# Altium PCB Ticket_Dispancer.PcbDoc (part 2 of 5)
Units mm, origin at the board's own origin, x right, y up, seen from the top; angles counter-clockwise.
Board outline 150.11 x 200.66 mm, 2 copper layers (Top Layer, Bottom Layer); 297 components, 258 nets, 997 pads, 217 vias.
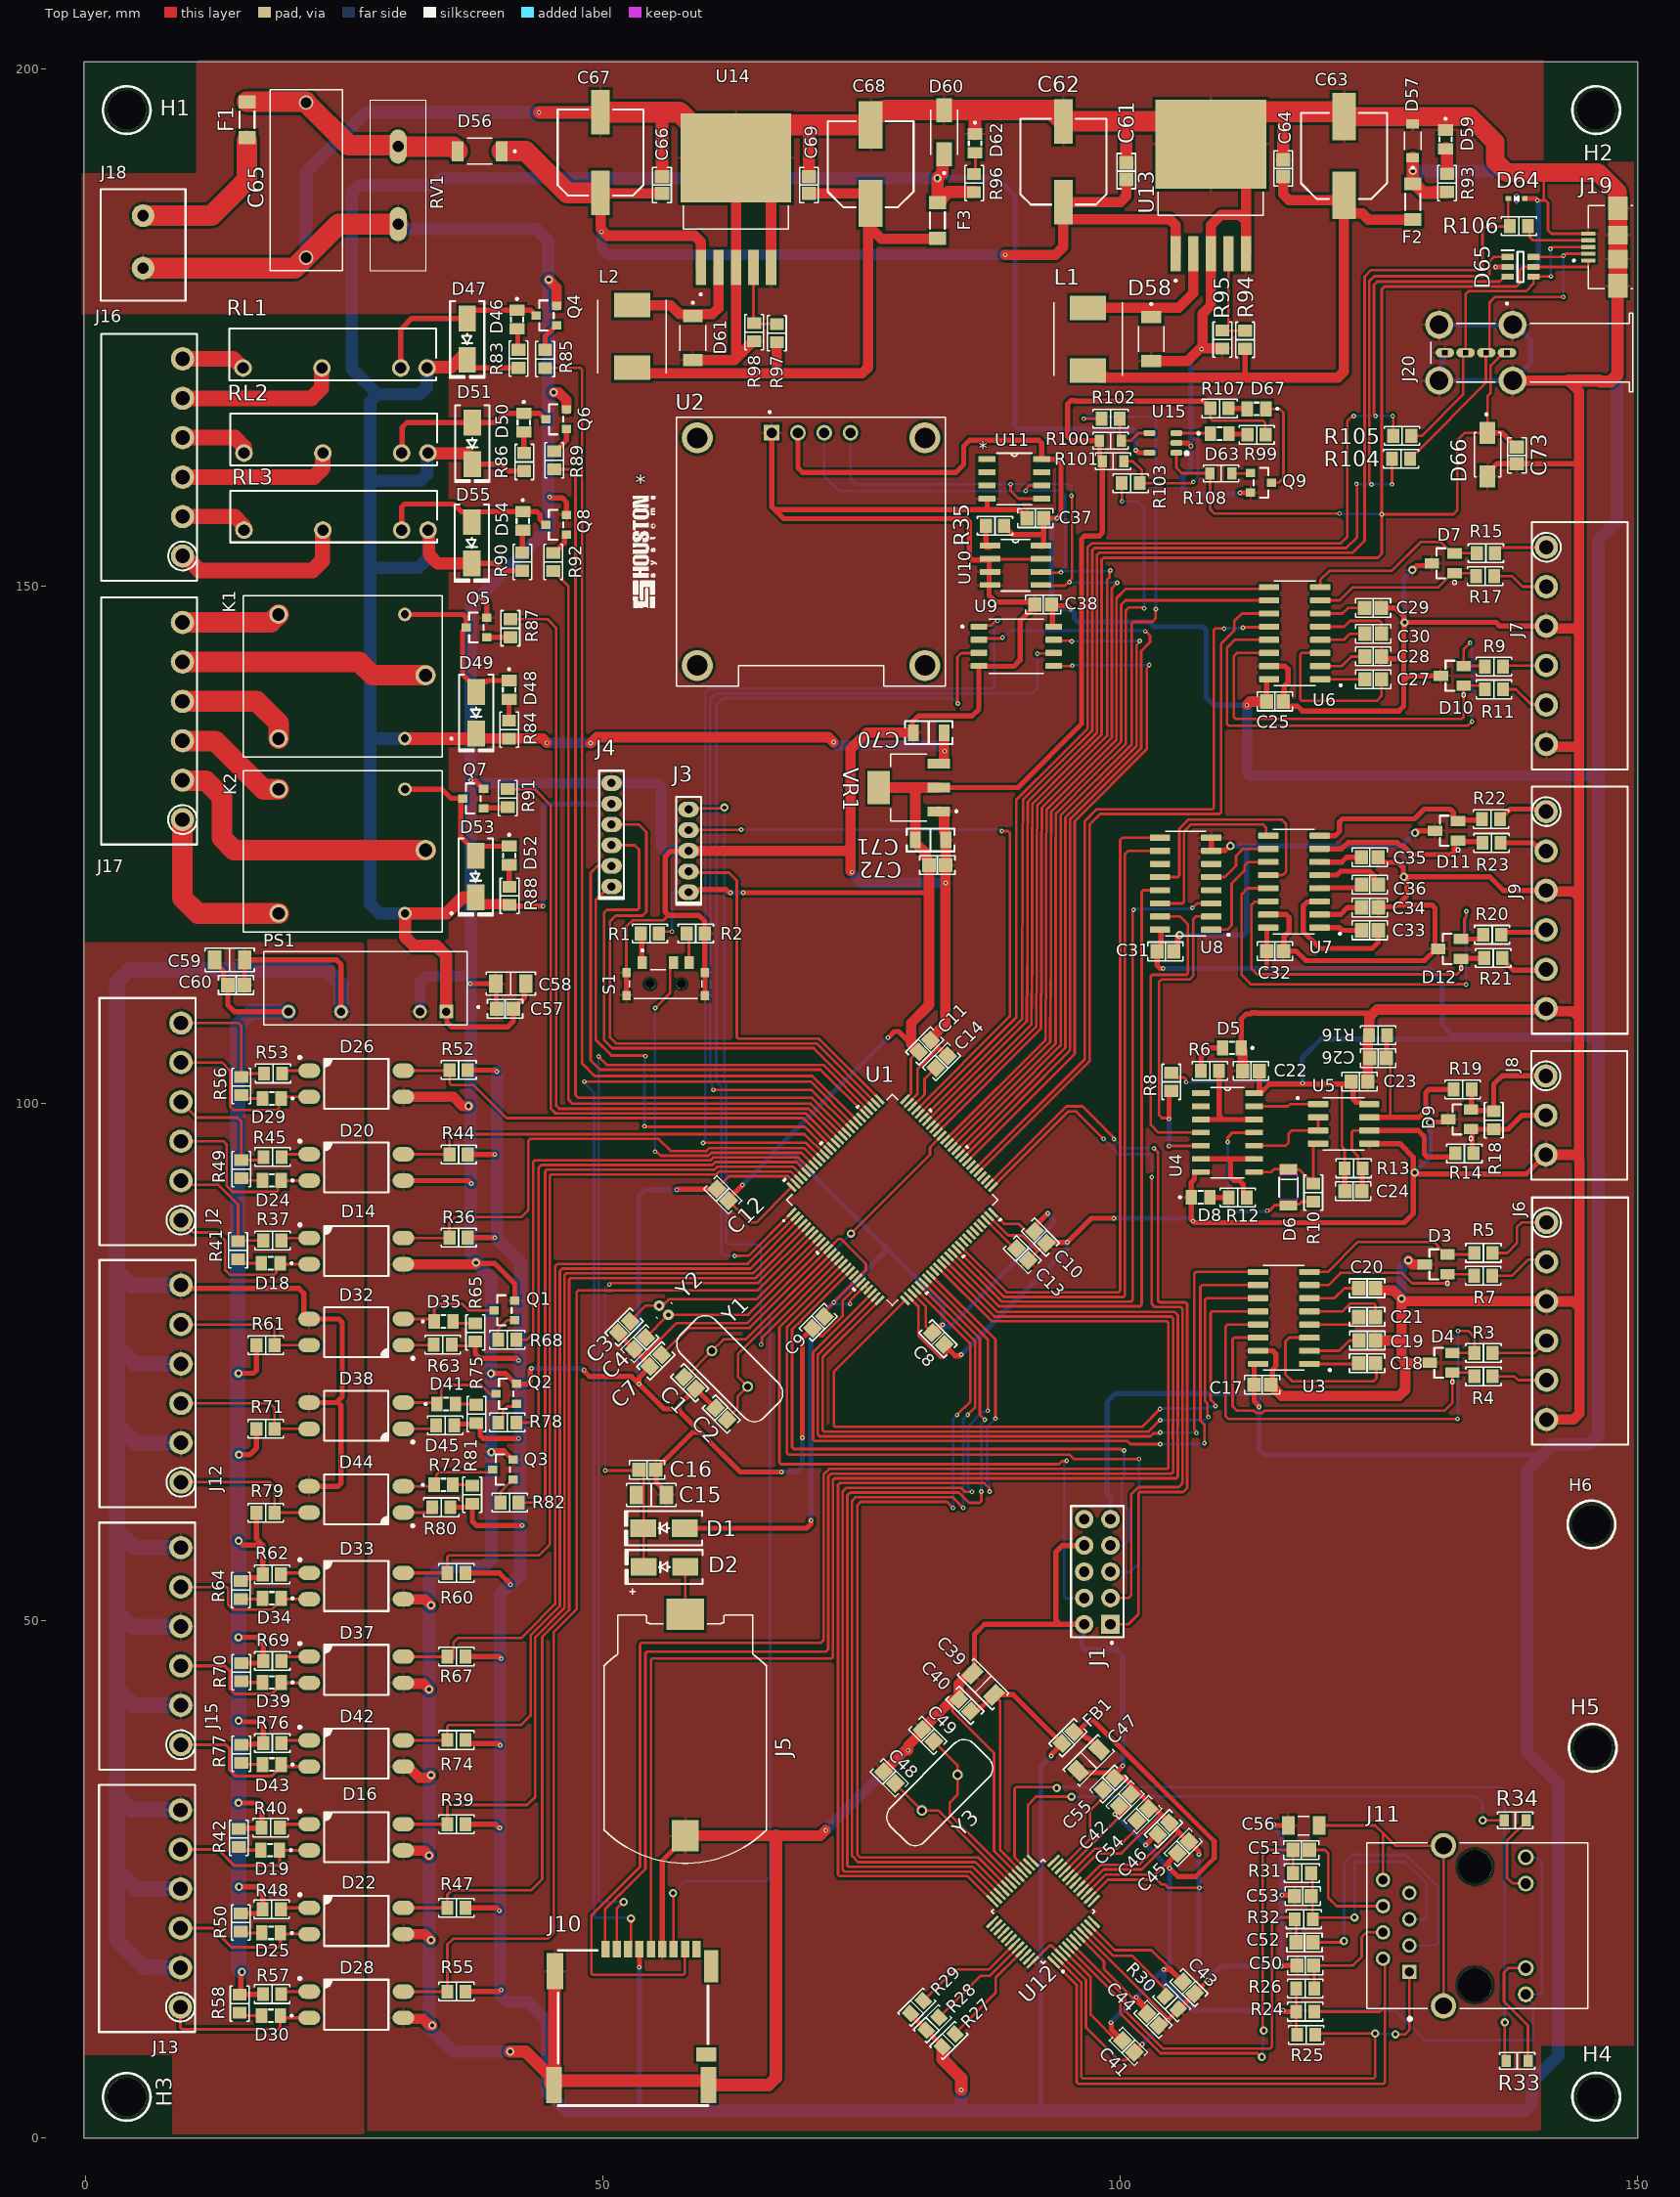
[diagram p0: Top Layer view]

## Part data (continued)
D1 D2 D47 D49 D51 D53 D55: "DIODE GEN PURP 1KV 1A DO214AC", Current - Average Rectified (Io)=1A, Current - Reverse Leakage @ Vr="5 µA @ 1000 V", manufacturer="Comchip Technology", Operating Temperature - Junction="-55°C ~ 150°C", Package / Case="DO-214AC, SMA", Supplier Device Package="DO-214AC (SMA)", Supplier Part Number 1=641-1018-1-ND, Voltage - DC Reverse (Vr) (Max)="1000 V", Voltage - Forward (Vf) (Max) @ If="1.1 V @ 1 A", componentlink1description=Datasheet, componentlink1url="http://www.comchiptech.com/admin/files/product/CGRA4001-G Thru647907. CGRA4007-G RevE.pdf", componentlink2description="DigiKey Link", componentlink2url=https://www.digikey.com/en/products/detail/comchip-technology/CGRA4007-G/1121050, Diode Type=Standard, lastupdated="03-06-2024 7.54.36 PM", Lifecycle Status=Active, Minimum Order=1, Mounting Type="Surface Mount", packaging=TapeAndReel, Part Number=CGRA4007-G, Part Status=Active, partid=670, price=0.04, series=-, Speed="Standard Recovery >500ns, > 200mA (Io)", Supplier 1=DigiKey
D3 D4 D7 D9 D10 D11 D12: "SM Series 12 V 400 W Asymmetrical TVS Diode for Extended Common-Mode - SOT-23", Package="SOT-23 Semtech", Check_prices=https://www.snapeda.com/parts/SM712.TCT/Semtech/view-part/?ref=eda, MF="Semtech Corporation", MP=SM712.TCT, SnapEDA_Link=https://www.snapeda.com/parts/SM712.TCT/Semtech/view-part/?ref=snap
D5 D8 D18 D19 D24 D25 D29 D30 D34 D35 D39 D41 D43 D45 D46 D48 D50 D52 D54 D59 D62 D63 D67: "LED Uni-Color Green 4-Pin Chip 0805 T/R", Package=None, Availability=Unavailable, MP=597-3305-607F, price=None
D6: "Diode Standard 75 V 300mA (DC) Surface Mount SOD-80 MiniMELF", Package="SOD-80 Vishay Semiconductor Diodes Division", Check_prices=https://www.snapeda.com/parts/LL4148-GS08/Vishay+General+Semiconductor+-+Diodes+Division/view-part/?ref=eda, MF="Vishay General Semiconductor - Diodes Division", MP=LL4148-GS08, SnapEDA_Link=https://www.snapeda.com/parts/LL4148-GS08/Vishay+General+Semiconductor+-+Diodes+Division/view-part/?ref=snap
D14 D16 D20 D22 D26 D28 D32 D33 D37 D38 D42 D44: "OPTOISOLATR 5KV TRANSISTOR 4-SMD", Current - DC Forward (If) (Max)=50mA, Current Transfer Ratio (Max)="600% @ 5mA", Current Transfer Ratio (Min)="50% @ 5mA", Device Package="4-SMD, Gull Wing", manufacturer="Lite-On Inc.", Operating Temperature="-30°C ~ 110°C", Supplier Device Package=4-SMD, Supplier Part Number 1=160-1893-1-ND, Voltage - Forward (Vf) (Typ)=1.2V, Voltage - Isolation=5000Vrms, Voltage - Output (Max)=35V, componentlink1description=Datasheet, componentlink1url=http://optoelectronics.liteon.com/upload/download/DS-70-96-0016/LTV-8X7%20series%20201610%20.pdf, componentlink2description="DigiKey Link", componentlink2url=http://digikey.com/product-detail/en/lite-on-inc/LTV-817S-TA1/160-1893-1-ND/3306757, Current - Output / Channel=50mA, Input Type=DC, lastupdated="12-01-2020 9.58.48 PM", Lifecycle Status=Active, Minimum Order=1, Mounting Type="Surface Mount", Number of Channels=1, Output Type=Transistor, Package / Case="4-SMD, Gull Wing", packaging=TapeAndReel, Part Number=LTV-817S-TA1, Part Status=Active, price=0.12, Rise / Fall Time (Typ)="4µs, 3µs", series=-, Supplier 1=DigiKey, Vce Saturation (Max)=200mV
D56 D58 D61: "Schottky Diodes & Rectifiers 5A, 40V, Schottky Rectifier", Package=None, Check_prices=https://www.snapeda.com/parts/SS54FSH%20M2G/taiwan/view-part/?ref=eda, MF="Taiwan Semiconductor", MP="SS54FSH M2G", SnapEDA_Link=https://www.snapeda.com/parts/SS54FSH%20M2G/taiwan/view-part/?ref=snap
D60: "Zener Diode 5.1 V 1.5 W Â±5% Surface Mount SMA", Package="SMA-2 ON Semiconductor", Check_prices=https://www.snapeda.com/parts/SZ1SMA5918BT3G/Onsemi/view-part/?ref=eda, MF="ON Semiconductor", MP=SZ1SMA5918BT3G, SnapEDA_Link=https://www.snapeda.com/parts/SZ1SMA5918BT3G/Onsemi/view-part/?ref=snap
D64: "ESD, SOD-523, 0.05ÂµA, 3.3V, Unidir", Package="SOD-523 Diotec", Check_prices=https://www.snapeda.com/parts/ESD5Z3V3/Diotec/view-part/?ref=eda, MF="Diotec Semiconductor", MP=ESD5Z3V3, SnapEDA_Link=https://www.snapeda.com/parts/ESD5Z3V3/Diotec/view-part/?ref=snap
D65: "17V Clamp 5A (8/20µs) Ipp Tvs Diode Surface Mount SOT-23-6", Package="SOT-23-6 STMicroelectronics", Check_prices=https://www.snapeda.com/parts/USBLC6-2SC6Y/STMicroelectronics/view-part/?ref=eda, MF=STMicroelectronics, MP=USBLC6-2SC6Y, SnapEDA_Link=https://www.snapeda.com/parts/USBLC6-2SC6Y/STMicroelectronics/view-part/?ref=snap
F1: "FUSE BOARD MOUNT 1.5A 63VDC 1206", Breaking Capacity @ Rated Voltage=50A, Current Rating (Amps)=1.5A, Device Package="1206 (3216 Metric)", manufacturer="Eaton - Electronics Division", Operating Temperature="-55°C ~ 125°C", Supplier Part Number 1=283-2979-1-ND, Voltage Rating - DC=63V, Approval Agency=cURus, Approvals=cURus, componentlink1description=Datasheet, componentlink1url=http://www.cooperindustries.com/content/dam/public/bussmann/Electronics/Resources/product-datasheets/Bus_Elx_DS_4309_CC12H_Series.pdf, componentlink2description="DigiKey Link", componentlink2url=http://digikey.com/product-detail/en/eaton-electronics-division/CC12H1.5A-TR/283-2979-1-ND/2138910, Fuse Type="Board Mount (Cartridge Style Excluded)", lastupdated="02-09-2020 1.30.41 AM", Lifecycle Status=Active, Melting I²t=0.4, Minimum Order=1, Mounting Type="Surface Mount", Package / Case="1206 (3216 Metric)", packaging=TapeAndReel, Part Number=CC12H1.5A-TR, Part Status=Active, price=0.39, Response Time="Slow Blow", series=CC12H, Size / Dimension="0.126\" L x 0.063\" W x 0.024\" H (3.20mm x 1.60mm x 0.60mm)", Supplier 1=DigiKey
F2 F3: "FUSE BOARD MNT 2.5A 32VAC 63VDC", Breaking Capacity @ Rated Voltage=63A, Current Rating (Amps)=2.5A, Device Package="1206 (3216 Metric)", manufacturer="Schurter Inc.", Operating Temperature="-55°C ~ 90°C", Supplier Part Number 1=486-1148-1-ND, Voltage Rating - AC=32V, Voltage Rating - DC=63V, Approval Agency="cURus, VDE", Approvals="cURus, VDE", componentlink1description=Datasheet, componentlink1url=https://us.schurter.com/pdf/english/typ_USI_1206.pdf, componentlink2description="DigiKey Link", componentlink2url=http://digikey.com/product-detail/en/schurter-inc/3413.0220.22/486-1148-1-ND/1522980, Fuse Type="Board Mount (Cartridge Style Excluded)", lastupdated="02-09-2020 1.30.41 AM", Lifecycle Status=Active, Melting I²t=0.94, Minimum Order=1, Mounting Type="Surface Mount", Package / Case="1206 (3216 Metric)", packaging=TapeAndReel, Part Number=3413.0220.22, Part Status=Active, price=0.26, Response Time="Fast Blow", series="USI 1206", Size / Dimension="0.126\" L x 0.063\" W x 0.024\" H (3.20mm x 1.60mm x 0.60mm)", Supplier 1=DigiKey
FB1: library part HRB0805S101K1.00FT, "FERRITE BEAD, CHIP, 0805, 100 OH", Current Rating (Max)=1A, DC Resistance (DCR) (Max)=200mOhm, Device Package="0805 (2012 Metric)", manufacturer="AEM, Inc.", Operating Temperature="-55°C ~ 125°C", Supplier Part Number 1=5433-HRB0805S101K1.00FTCT-ND, componentlink2description="DigiKey Link", componentlink2url=https://www.digikey.com/en/products/detail/aem-inc/HRB0805S101K1-00FT/23025488, Height (Max)="0.043\" (1.10mm)", Impedance @ Frequency="100 Ohms @ 100 MHz", lastupdated="29-03-2026 8.09.51 PM", Lifecycle Status=Active, Minimum Order=1, Mounting Type="Surface Mount", Number of Lines=1, Package / Case="0805 (2012 Metric)", packaging=TapeAndReel, Part Number=HRB0805S101K1.00FT, partid=4402, price=158.37, series=HRB, Size / Dimension="0.079\" L x 0.049\" W (2.00mm x 1.25mm)", Supplier 1=DigiKey
H1 H2 H3 H4 H5 H6: "SCREW HEAD DIA 4.5MM, SREW LEG DIA 3 MM"
J1: "10 Pin 5X2Pos THT BergeStick 2.54MM MTSW-105-X-X-D-X", Package=None, Availability=Unavailable, MF="{'manufacturer': u'Samtec Inc.'}", MP=MTSW-105-X-X-D-X, price=None
J2 J6 J7 J9 J12 J13 J15 J16 J17: "TERM BLOCK HDR 6POS 90DEG 3.81MM", Color=Green, Current - UL=10A, manufacturer="Amphenol Anytek", Operating Temperature="-40°C ~ 115°C", Supplier Part Number 1=609-3823-ND, Voltage - UL=300V, componentlink1description=Datasheet, componentlink1url=http://portal.fciconnect.com/Comergent//fci/drawing/oqxx32x100j0g.pdf, componentlink2description="DigiKey Link", componentlink2url=//digikey.com/product-detail/en/amphenol-anytek/OQ0632510000G/609-3823-ND/2261282, Contact Mating Finish=Tin, Header Orientation="90°, Right Angle", lastupdated="16-12-2019 7.16.11 PM", Lifecycle Status=0, Minimum Order=1, Mounting Type="Through Hole", Number of Levels=1, Number of Positions=6, packaging=Bulk, Part Number=OQ0632510000G, Part Status=Active, Pitch="0.150\" (3.81mm)", Positions Per Level=6, price=0.80, series=06-381, Supplier 1=DigiKey, Termination Style=Solder, Type="Header, Male Pins, Shrouded (4 Side)"
J3: "CONN HDR 5POS 0.079 GOLD PCB", Current Rating (Amps)=2A, Insulation Color=Black, manufacturer="Sullins Connector Solutions", Material Flammability Rating="UL94 V-0", Operating Temperature="-40°C ~ 105°C", Supplier Part Number 1=S5751-05-ND, componentlink1description=Datasheet, componentlink1url=https://drawings-pdf.s3.amazonaws.com/10483.pdf, componentlink2description="DigiKey Link", componentlink2url=https://www.digikey.com/en/products/detail/sullins-connector-solutions/NPPN051BFCN-RC/804807, Connector Type=Header, Contact Finish - Mating=Gold, Contact Finish - Post=Gold, Contact Finish Thickness - Mating=Flash, Contact Length - Post="0.094\" (2.40mm)", Contact Type="Female Socket", Fastening Type=Push-Pull, Insulation Height="0.173\" (4.40mm)", lastupdated="21-06-2022 2.43.08 PM", Lifecycle Status=Active, Minimum Order=1, Mounting Type="Through Hole", Number of Positions=5, Number of Positions Loaded=All, Number of Rows=1, packaging=Tube, Part Number=NPPN051BFCN-RC, Part Status=Active, Pitch - Mating="0.079\" (2.00mm)", price=0.35, series=-, Style="Board to Board", Supplier 1=DigiKey, Termination=Solder
J4: "CONN HDR 6POS 0.079 GOLD PCB", Current Rating (Amps)=2A, Insulation Color=Black, manufacturer="Sullins Connector Solutions", Material Flammability Rating="UL94 V-0", Operating Temperature="-40°C ~ 105°C", Supplier Part Number 1=S5751-06-ND, componentlink1description=Datasheet, componentlink1url=https://drawings-pdf.s3.amazonaws.com/10483.pdf, componentlink2description="DigiKey Link", componentlink2url=https://www.digikey.com/en/products/detail/sullins-connector-solutions/NPPN061BFCN-RC/804808, Connector Type=Header, Contact Finish - Mating=Gold, Contact Finish - Post=Gold, Contact Finish Thickness - Mating=Flash, Contact Length - Post="0.094\" (2.40mm)", Contact Type="Female Socket", Fastening Type=Push-Pull, Insulation Height="0.173\" (4.40mm)", lastupdated="21-06-2022 2.43.22 PM", Lifecycle Status=Active, Minimum Order=1, Mounting Type="Through Hole", Number of Positions=6, Number of Positions Loaded=All, Number of Rows=1, packaging=Tube, Part Number=NPPN061BFCN-RC, Part Status=Active, Pitch - Mating="0.079\" (2.00mm)", price=0.40, series=-, Style="Board to Board", Supplier 1=DigiKey, Termination=Solder
J5: "Coin Cell Battery Retainer, Horizontal SMT, for CR2032 Coin Cell Batteries, Tape & Reeled", Package=None, Check_prices=https://www.snapeda.com/parts/S8421-45R/Harwin+Inc./view-part/?ref=eda, MF=Harwin, MP=S8421-45R, SnapEDA_Link=https://www.snapeda.com/parts/S8421-45R/Harwin+Inc./view-part/?ref=snap
J8: "TERM BLOCK HDR 3POS 90DEG 3.81MM", Color=Green, Current - UL=10A, manufacturer="Amphenol Anytek", Operating Temperature="-40°C ~ 115°C", Supplier Part Number 1=609-3820-ND, Voltage - UL=300V, componentlink1description=Datasheet, componentlink1url=http://portal.fciconnect.com/Comergent//fci/drawing/oqxx32x100j0g.pdf, componentlink2description="DigiKey Link", componentlink2url=//digikey.com/product-detail/en/amphenol-anytek/OQ0332510000G/609-3820-ND/2261261, Contact Mating Finish=Tin, Header Orientation="90°, Right Angle", lastupdated="16-12-2019 7.14.46 PM", Lifecycle Status=0, Minimum Order=1, Mounting Type="Through Hole", Number of Levels=1, Number of Positions=3, packaging=Bulk, Part Number=OQ0332510000G, Part Status=Active, Pitch="0.150\" (3.81mm)", Positions Per Level=3, price=0.53, series=06-381, Supplier 1=DigiKey, Termination Style=Solder, Type="Header, Male Pins, Shrouded (4 Side)"
J10: "Memory Card Connectors MicroSD Crd Conn SMT Revrs Mnt Push-Push", Package=None, Check_prices=https://www.snapeda.com/parts/PJS008-2003-0/ICH/view-part/?ref=eda, MF="Yamaichi Electronics", MP=PJS008-2003-0, SnapEDA_Link=https://www.snapeda.com/parts/PJS008-2003-0/ICH/view-part/?ref=snap
J11: "DIP RJ45 Connector;", Package=None, Availability="Not in stock", Check_prices=https://www.snapeda.com/parts/HR911105A/HanRun/view-part/?ref=eda, MF=hanrun, MP=HR911105A, price=None, SnapEDA_Link=https://www.snapeda.com/parts/HR911105A/HanRun/view-part/?ref=snap
J18: "TERM BLK 2P SIDE ENT 5.08MM PCB", Color=Green, Current="13.5 A", manufacturer="TE Connectivity AMP Connectors", Supplier Part Number 1=A113320-ND, Voltage="300 V", componentlink1description=Datasheet, componentlink1url=https://www.te.com/commerce/DocumentDelivery/DDEController?Action=srchrtrv&DocNm=282837&DocType=Customer+Drawing&DocLang=English, componentlink2description="DigiKey Link", componentlink2url=https://www.digikey.com/en/products/detail/te-connectivity-amp-connectors/282837-2/2187973, Features="Interlocking (Side)", lastupdated="21-06-2022 3.00.23 PM", Lifecycle Status=Active, Mating Orientation="Horizontal with Board", Minimum Order=1, Mounting Type="Through Hole", Number of Levels=1, packaging=Tray, Part Number=282837-2, Part Status=Active, Pitch="0.200\" (5.08mm)", Positions Per Level=2, price=0.31, series=Buchanan, Supplier 1=DigiKey, Wire Gauge="16-28 AWG", Wire Termination="Screw - Rising Cage Clamp"
J19: "Conn Data USB TypeAB Socket 5Cnts RightAngle Micro SMT", Package=None, Check_prices=https://www.snapeda.com/parts/10104111-0001LF/Amphenol/view-part/?ref=eda, MF=Amphenol, MP=10104111-0001LF, SnapEDA_Link=https://www.snapeda.com/parts/10104111-0001LF/Amphenol/view-part/?ref=snap
J20: "Connector, USB A Jack, PCB side-mount, 90 degrees, nickel shell, board lock, black insulator, tray", Package=None, Check_prices=https://www.snapeda.com/parts/54-00013/Tensility/view-part/?ref=eda, MF="Tensility International Corporation", MP=54-00013, SnapEDA_Link=https://www.snapeda.com/parts/54-00013/Tensility/view-part/?ref=snap
K1 K2: "General Purpose Non Latching 12VDC SPDT Through Hole Relays RoHS", Package="NON STANDARD-5 Songle Relay", Check_prices=https://www.snapeda.com/parts/SRD-12VDC-SL-C/Songle+Relay/view-part/?ref=eda, MF="Songle Relay", MP=SRD-12VDC-SL-C, SnapEDA_Link=https://www.snapeda.com/parts/SRD-12VDC-SL-C/Songle+Relay/view-part/?ref=snap
PS1: "DC/DC Converter, 1 Watt, SIP7, Single Output", Package=None, Availability=Unavailable, MF="{'manufacturer': u'Recom Power'}", MP=RK-0505S/H, price=None
Q1 Q2 Q3 Q4 Q5 Q6 Q7 Q8 Q9: "TRANS NPN 45V 0.1A SOT23", Current - Collector (Ic) (Max)=100mA, Current - Collector Cutoff (Max)="15nA (ICBO)", DC Current Gain (hFE) (Min) @ Ic, Vce="200 @ 2mA, 5V", Frequency - Transition=100MHz, manufacturer="ON Semiconductor", Operating Temperature="-55°C ~ 150°C (TJ)", Package / Case="TO-236-3, SC-59, SOT-23-3", Power - Max=300mW, Supplier Device Package="SOT-23-3 (TO-236)", Supplier Part Number 1=BC847BLT1GOSCT-ND, Voltage - Collector Emitter Breakdown (Max)=45V, componentlink1description=Datasheet, componentlink1url=http://www.onsemi.com/pub/Collateral/BC846ALT1-D.PDF, componentlink2description="DigiKey Link", componentlink2url=http://digikey.com/product-detail/en/on-semiconductor/BC847BLT1G/BC847BLT1GOSCT-ND/917834, lastupdated="29-03-2026 8.43.49 PM", Lifecycle Status=Active, Minimum Order=1, Mounting Type="Surface Mount", packaging=TapeAndReel, Part Number=BC847BLT1G, Part Status=Active, partid=246, price=0.02, series=-, Supplier 1=DigiKey, Transistor Type=NPN, Vce Saturation (Max) @ Ib, Ic="600mV @ 5mA, 100mA"
R1 R2 R35 R37 R40 R45 R48 R53 R57 R62 R63 R69 R72 R76 R80 R85 R87 R89 R91 R92 R95 R98: library part ESR10EZPF1001, "RES SMD 1K OHM 1% 0.4W 0805", Device Package="0805 (2012 Metric)", manufacturer="Rohm Semiconductor", Operating Temperature="-55°C ~ 155°C", Power (Watts)="0.4W, 2/5W", Ratings=AEC-Q200, Supplier Device Package=0805, Supplier Part Number 1=RHM1.00KAECT-ND, Temperature Coefficient=±100ppm/°C, Tolerance=±1%, componentlink1description=Datasheet, componentlink1url=https://www.rohm.com/datasheet/ESR01MZPF/esr-e, componentlink2description="DigiKey Link", componentlink2url=https://www.digikey.com/en/products/detail/rohm-semiconductor/ESR10EZPF1001/1983480, Composition="Thick Film", Features="Automotive AEC-Q200, Pulse Withstanding", Height - Seated (Max)="0.026\" (0.65mm)", lastupdated="08-02-2024 9.02.37 PM", Lifecycle Status=Active, Minimum Order=1, Number of Terminations=2, Package / Case="0805 (2012 Metric)", packaging=TapeAndReel, Part Number=ESR10EZPF1001, Part Status=Active, partid=28032, price=0.02, Resistance="1 kOhms", series=ESR, Size / Dimension="0.079\" L x 0.049\" W (2.00mm x 1.25mm)", Supplier 1=DigiKey
R3 R4 R5 R7 R9 R11 R14 R15 R17 R19 R20 R21 R22 R23: library part RNCS0805BKE10R0, "RES 10 OHM 0.1% 1/10W 0805", Device Package="0805 (2012 Metric)", manufacturer="Stackpole Electronics Inc", Operating Temperature="-55°C ~ 155°C", Power (Watts)="0.1W, 1/10W", Ratings=AEC-Q200, Supplier Device Package=0805, Supplier Part Number 1=RNCS0805BKE10R0CT-ND, Temperature Coefficient=±25ppm/°C, Tolerance=±0.1%, componentlink1description=Datasheet, componentlink1url=https://www.seielect.com/catalog/sei-rncs_rnch.pdf, componentlink2description="DigiKey Link", componentlink2url=https://www.digikey.com/en/products/detail/stackpole-electronics-inc/RNCS0805BKE10R0/1800064, Composition="Thin Film", Features="Anti-Corrosive, Automotive AEC-Q200, Moisture Resistant", Height - Seated (Max)="0.026\" (0.65mm)", lastupdated="08-02-2024 9.02.39 PM", Lifecycle Status=Active, Minimum Order=1, Number of Terminations=2, Package / Case="0805 (2012 Metric)", packaging=TapeAndReel, Part Number=RNCS0805BKE10R0, Part Status=Active, partid=27711, price=0.07, Resistance="10 Ohms", series=RNCS, Size / Dimension="0.079\" L x 0.049\" W (2.00mm x 1.25mm)", Supplier 1=DigiKey
R6 R12 R41 R42 R49 R50 R56 R58 R64 R65 R68 R70 R75 R77 R78 R81 R82 R83 R84 R86 R88 R90 R107: library part CRCW0805330RFKEAHP, "RES SMD 330 OHM 1% 1/2W 0805", Device Package="0805 (2012 Metric)", manufacturer="Vishay Dale", Operating Temperature="-55°C ~ 155°C", Power (Watts)="0.5W, 1/2W", Ratings=AEC-Q200, Supplier Device Package=0805, Supplier Part Number 1=541-330TCT-ND, Temperature Coefficient=±100ppm/°C, Tolerance=±1%, componentlink1description=Datasheet, componentlink1url=http://www.vishay.com/docs/20043/crcwhpe3.pdf, componentlink2description="DigiKey Link", componentlink2url=https://www.digikey.com/en/products/detail/vishay-dale/CRCW0805330RFKEAHP/2226912, Composition="Thick Film", Features="Automotive AEC-Q200, Pulse Withstanding", Lifecycle Status=Active, Minimum Order=1, Number of Terminations=2, Package / Case="0805 (2012 Metric)", packaging=TapeAndReel, Part Number=CRCW0805330RFKEAHP, Part Status=Active, partid=30364, price=0.02, Resistance="330 Ohms", Size / Dimension="0.079\" L x 0.049\" W (2.00mm x 1.25mm)", Supplier 1=DigiKey
  R6 R12 R41 R42 R49 R50 R56 R58 R64 R65 R68 R70 R75 R77 R78 R81 R82 R83 R84 R86 R88 R90: Height - Seated (Max)="0.020\" (0.50mm)", lastupdated="08-02-2024 9.02.28 PM", series=CRCW-HP
  R107: Height - Seated (Max)="0.024\" (0.60mm)", lastupdated="30-03-2026 8.13.11 PM", series="CRCW-HP e3"
R8: library part CPF0805B10KE, "RES SMD 10K OHM 0.1% 1/10W 0805", Device Package="0805 (2012 Metric)", manufacturer="TE Connectivity Passive Product", Operating Temperature="-55°C ~ 155°C", Power (Watts)="0.1W, 1/10W", Supplier Device Package=0805, Supplier Part Number 1=A106043CT-ND, Temperature Coefficient=±25ppm/°C, Tolerance=±0.1%, componentlink1description=Datasheet, componentlink1url=https://www.te.com/commerce/DocumentDelivery/DDEController?Action=srchrtrv&DocNm=1773200&DocType=DS&DocLang=English, componentlink2description="DigiKey Link", componentlink2url=https://www.digikey.com/en/products/detail/te-connectivity-passive-product/CPF0805B10KE/2389790, Composition="Thin Film", Height - Seated (Max)="0.026\" (0.65mm)", lastupdated="08-02-2024 9.02.39 PM", Lifecycle Status=Active, Minimum Order=1, Number of Terminations=2, Package / Case="0805 (2012 Metric)", packaging=TapeAndReel, Part Number=CPF0805B10KE, Part Status=Active, partid=27724, price=0.09, Resistance="10 kOhms", series="CPF, Neohm", Size / Dimension="0.079\" L x 0.049\" W (2.00mm x 1.25mm)", Supplier 1=DigiKey
R10 R13 R16: library part CPF0805B1K0E, "RES SMD 1K OHM 0.1% 1/10W 0805", Device Package="0805 (2012 Metric)", manufacturer="TE Connectivity Passive Product", Operating Temperature="-55°C ~ 155°C", Power (Watts)="0.1W, 1/10W", Supplier Device Package=0805, Supplier Part Number 1=A106044CT-ND, Temperature Coefficient=±25ppm/°C, Tolerance=±0.1%, componentlink1description=Datasheet, componentlink1url=https://www.te.com/commerce/DocumentDelivery/DDEController?Action=srchrtrv&DocNm=1773200&DocType=DS&DocLang=English, componentlink2description="DigiKey Link", componentlink2url=https://www.digikey.com/en/products/detail/te-connectivity-passive-product/CPF0805B1K0E/2390399, Composition="Thin Film", Height - Seated (Max)="0.026\" (0.65mm)", lastupdated="08-02-2024 9.02.39 PM", Lifecycle Status=Active, Minimum Order=1, Number of Terminations=2, Package / Case="0805 (2012 Metric)", packaging=TapeAndReel, Part Number=CPF0805B1K0E, Part Status=Active, partid=27725, price=0.09, Resistance="1 kOhms", series="CPF, Neohm", Size / Dimension="0.079\" L x 0.049\" W (2.00mm x 1.25mm)", Supplier 1=DigiKey
R18: library part RMCF0805FT120R, "RES 120 OHM 1% 1/8W 0805", Device Package="0805 (2012 Metric)", manufacturer="Stackpole Electronics Inc", Operating Temperature="-55°C ~ 155°C", Power (Watts)="0.125W, 1/8W", Ratings=AEC-Q200, Supplier Device Package=0805, Supplier Part Number 1=738-RMCF0805FT120RCT-ND, Temperature Coefficient=±100ppm/°C, Tolerance=±1%, componentlink1description=Datasheet, componentlink1url=https://www.seielect.com/catalog/sei-rmcf_rmcp.pdf, componentlink2description="DigiKey Link", componentlink2url=https://www.digikey.com/en/products/detail/stackpole-electronics-inc/RMCF0805FT120R/1712658, Composition="Thick Film", Features="Automotive AEC-Q200", Height - Seated (Max)="0.026\" (0.65mm)", lastupdated="08-02-2024 9.02.18 PM", Lifecycle Status=Active, Minimum Order=1, Number of Terminations=2, Package / Case="0805 (2012 Metric)", packaging=CutTape, Part Number=RMCF0805FT120R, Part Status=Active, partid=32530, price=0.01, Resistance="120 Ohms", series=RMCF, Size / Dimension="0.079\" L x 0.049\" W (2.00mm x 1.25mm)", Supplier 1=DigiKey
R24 R25 R31 R32: library part RCC080549R9FKEA, "RCC0805 100 49R9 1% ET1 E3", Device Package="0805 (2012 Metric)", manufacturer="Vishay Dale", Operating Temperature="-55°C ~ 155°C", Power (Watts)="0.25W, 1/4W", Ratings=AEC-Q200, Supplier Device Package=0805, Supplier Part Number 1=541-RCC080549R9FKEACT-ND, Temperature Coefficient=±100ppm/°C, Tolerance=±1%, componentlink1description=Datasheet, componentlink1url=https://www.vishay.com/docs/20066/rcce3.pdf, componentlink2description="DigiKey Link", componentlink2url=https://www.digikey.com/en/products/detail/vishay-dale/RCC080549R9FKEA/12084236, Composition="Thick Film", Features="Automotive AEC-Q200", Height - Seated (Max)="0.020\" (0.50mm)", lastupdated="08-02-2024 9.00.29 PM", Lifecycle Status=Active, Minimum Order=1, Number of Terminations=2, Package / Case="0805 (2012 Metric)", packaging=TapeAndReel, Part Number=RCC080549R9FKEA, Part Status=Active, partid=60620, price=0.02, Resistance="49.9 Ohms", series="RCC e3", Size / Dimension="0.079\" L x 0.049\" W (2.00mm x 1.25mm)", Supplier 1=DigiKey
R26: library part KTR10EZPF11R0, "RES SMD 11 OHM 1% 1/8W 0805", Device Package="0805 (2012 Metric)", manufacturer="Rohm Semiconductor", Operating Temperature="-55°C ~ 155°C", Power (Watts)="0.125W, 1/8W", Ratings=AEC-Q200, Supplier Device Package=0805, Supplier Part Number 1=RHM11AHCT-ND, Temperature Coefficient=±100ppm/°C, Tolerance=±1%, componentlink1description=Datasheet, componentlink1url=https://www.rohm.com/datasheet/KTR03EZPF/ktr-e, componentlink2description="DigiKey Link", componentlink2url=https://www.digikey.com/en/products/detail/rohm-semiconductor/KTR10EZPF11R0/4051740, Composition="Thick Film", Features="Automotive AEC-Q200, High Voltage", Height - Seated (Max)="0.026\" (0.65mm)", lastupdated="08-02-2024 9.01.51 PM", Lifecycle Status=Active, Minimum Order=1, Number of Terminations=2, Package / Case="0805 (2012 Metric)", packaging=TapeAndReel, Part Number=KTR10EZPF11R0, Part Status=Active, partid=39009, price=0.02, Resistance="11 Ohms", series=KTR, Size / Dimension="0.079\" L x 0.049\" W (2.00mm x 1.25mm)", Supplier 1=DigiKey
R27 R28 R29: library part RNCS0805BKE10K0, "RES 10K OHM 0.1% 1/10W 0805", Device Package="0805 (2012 Metric)", manufacturer="Stackpole Electronics Inc", Operating Temperature="-55°C ~ 155°C", Power (Watts)="0.1W, 1/10W", Ratings=AEC-Q200, Supplier Device Package=0805, Supplier Part Number 1=RNCS0805BKE10K0CT-ND, Temperature Coefficient=±25ppm/°C, Tolerance=±0.1%, componentlink1description=Datasheet, componentlink1url=https://www.seielect.com/catalog/sei-rncs_rnch.pdf, componentlink2description="DigiKey Link", componentlink2url=https://www.digikey.com/en/products/detail/stackpole-electronics-inc/RNCS0805BKE10K0/1800067, Composition="Thin Film", Features="Anti-Corrosive, Automotive AEC-Q200, Moisture Resistant", Height - Seated (Max)="0.026\" (0.65mm)", lastupdated="08-02-2024 9.02.39 PM", Lifecycle Status=Active, Minimum Order=1, Number of Terminations=2, Package / Case="0805 (2012 Metric)", packaging=TapeAndReel, Part Number=RNCS0805BKE10K0, Part Status=Active, partid=27713, price=0.07, Resistance="10 kOhms", series=RNCS, Size / Dimension="0.079\" L x 0.049\" W (2.00mm x 1.25mm)", Supplier 1=DigiKey
R30: library part RQ73C2A12K4BTD, "RES 12.4 KOHMS 0.1% 1/5W 0805", Device Package="0805 (2012 Metric)", manufacturer="TE Connectivity Passive Product", Operating Temperature="-55°C ~ 155°C", Power (Watts)="0.2W, 1/5W", Ratings=AEC-Q200, Supplier Device Package=0805, Supplier Part Number 1=A139862CT-ND, Temperature Coefficient=±10ppm/°C, Tolerance=±0.1%, componentlink1description=Datasheet, componentlink1url=//media.digikey.com/pdf/Data%20Sheets/Tyco%20Electronics%20P%20B%20PDFs/RQ73-0618%20v2.pdf, componentlink2description="DigiKey Link", componentlink2url=https://www.digikey.com/en/products/detail/te-connectivity-passive-product/RQ73C2A12K4BTD/9479810, Composition="Thin Film", Features="Anti-Sulfur, Automotive AEC-Q200", Height - Seated (Max)="0.026\" (0.65mm)", lastupdated="08-02-2024 9.02.26 PM", Lifecycle Status=Active, Minimum Order=1, Number of Terminations=2, Package / Case="0805 (2012 Metric)", packaging=TapeAndReel, Part Number=RQ73C2A12K4BTD, Part Status=Active, partid=30590, price=0.24, Resistance="12.4 kOhms", series=RQ73, Size / Dimension="0.079\" L x 0.049\" W (2.00mm x 1.25mm)", Supplier 1=DigiKey
R33 R34: library part RC0805FR-07330RL, "RES 330 OHM 1% 1/8W 0805", Device Package="0805 (2012 Metric)", manufacturer=Yageo, Operating Temperature="-55°C ~ 155°C", Power (Watts)="0.125W, 1/8W", Supplier Device Package=0805, Supplier Part Number 1=311-330CRCT-ND, Temperature Coefficient=±100ppm/°C, Tolerance=±1%, componentlink1description=Datasheet, componentlink1url=https://www.yageo.com/upload/media/product/productsearch/datasheet/rchip/PYu-RC_Group_51_RoHS_L_10.pdf, componentlink2description="DigiKey Link", componentlink2url=https://www.digikey.com/en/products/detail/yageo/RC0805FR-07330RL/727866, Composition="Thick Film", Features="Moisture Resistant", Height - Seated (Max)="0.024\" (0.60mm)", lastupdated="25-07-2024 9.20.25 AM", Lifecycle Status=Active, Minimum Order=1, Number of Terminations=2, Package / Case="0805 (2012 Metric)", packaging=TapeAndReel, Part Number=RC0805FR-07330RL, Part Status=Active, partid=32600, price=0.01, Resistance="330 Ohms", series=RC_L, Size / Dimension="0.079\" L x 0.049\" W (2.00mm x 1.25mm)", Supplier 1=DigiKey
R36 R39 R44 R47 R52 R55 R60 R61 R67 R71 R74 R79: library part ESR10EZPF1002, "RES SMD 10K OHM 1% 0.4W 0805", Device Package="0805 (2012 Metric)", manufacturer="Rohm Semiconductor", Operating Temperature="-55°C ~ 155°C", Power (Watts)="0.4W, 2/5W", Ratings=AEC-Q200, Supplier Device Package=0805, Supplier Part Number 1=RHM10.0KAECT-ND, Temperature Coefficient=±100ppm/°C, Tolerance=±1%, componentlink1description=Datasheet, componentlink1url=https://www.rohm.com/datasheet/ESR01MZPF/esr-e, componentlink2description="DigiKey Link", componentlink2url=https://www.digikey.com/en/products/detail/rohm-semiconductor/ESR10EZPF1002/1983481, Composition="Thick Film", Features="Automotive AEC-Q200, Pulse Withstanding", Height - Seated (Max)="0.026\" (0.65mm)", lastupdated="08-02-2024 9.02.37 PM", Lifecycle Status=Active, Minimum Order=1, Number of Terminations=2, Package / Case="0805 (2012 Metric)", packaging=TapeAndReel, Part Number=ESR10EZPF1002, Part Status=Active, partid=28034, price=0.02, Resistance="10 kOhms", series=ESR, Size / Dimension="0.079\" L x 0.049\" W (2.00mm x 1.25mm)", Supplier 1=DigiKey